# Altium PCB PCB_all.PcbDoc (part 2 of 5)
Units mm, origin at the board's own origin, x right, y up, seen from the top; angles counter-clockwise.
Board outline 345 x 232.5 mm, 2 copper layers (Top Layer, Bottom Layer); 484 components, 419 nets, 1569 pads, 736 vias.
Unrouted connection lines stored in the file: 51.
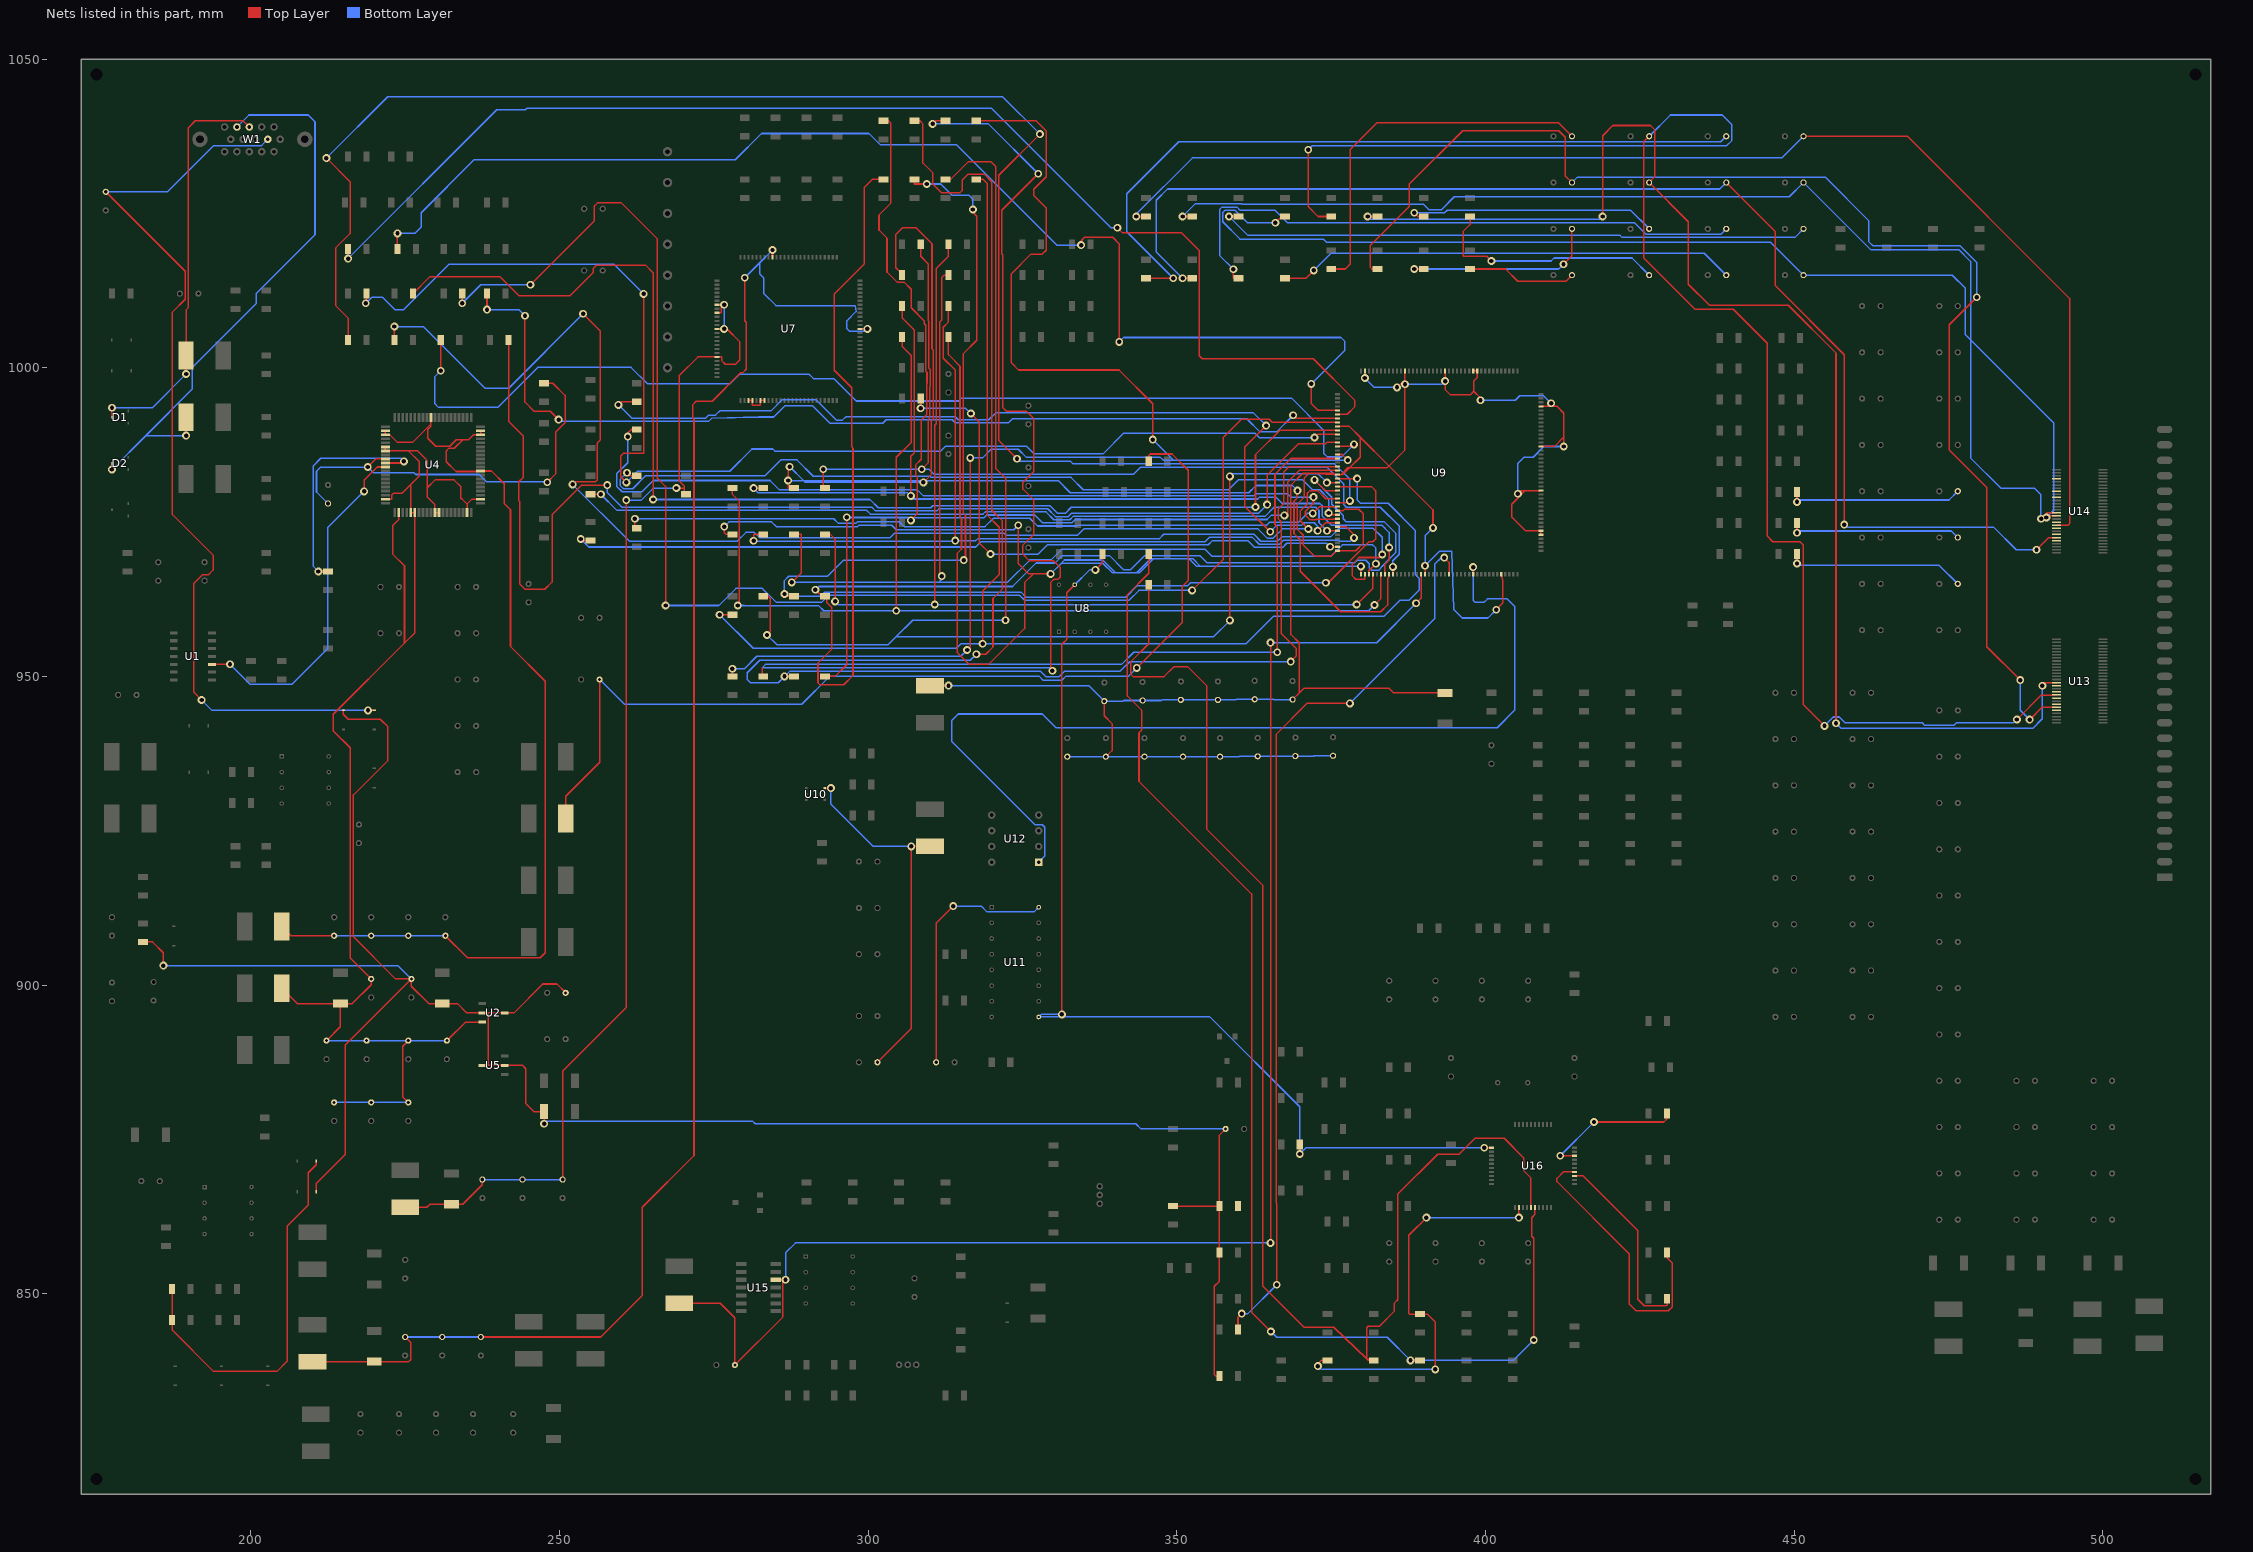
[diagram p2: the nets of this part, all layers, seen from the top]

## Via types
v1: diameter 1.27, hole 0.711, Top Layer to Bottom Layer, 736 vias

## Nets (pads, with @x,y where several pads share a name; then routed paths per layer and width w, separated by ;. In a path a pad name is that pad's centre, name@x,y a point inside that pad or via, vN(x,y) a via of type N, cw(c..) or ccw(c..) an arc to the next point about the centre after c; other vN are vias at no path point) (continued)
3V3SD: C64.1 C65.2 C66.2 C67.2 C68.2 C69.2 C71.2 C73.2 C75.2 C77.2 C81.2 C85.2 C89.2 C94.2 C98.2 L19.2 U9.17 U9.36 U9.45 U9.46 U9.56 U9.67 U9.77 U9.91 U9.92 U9.99 U9.109 U9.119 U9.129 U9.141 U9.150 U9.160 | length 398.7
  Top Layer w0.25: L19.2@310,948.5 312.992,948.5 v1(313.004,948.512) ; C98.2@338.25,946 338.25,943.612 339.496,942.365 339.496,937.996 C73.2@338.5,937 ; C77.2@368.75,946.25 369.818,947.318 ; U9.150@376,976.85 376.931,976.85 377.167,977.085 379.469,977.085 380.211,976.344 380.211,971.593 378.968,970.35 U9.160@376,970.35 375.844,970.35 374.963,969.469 372.311,969.469 370.484,971.296 370.484,972.857 369.478,973.863 369.478,977.863 370.605,978.99 370.605,982.119 371.408,982.922 ; U9.129@376,990.5 377.952,990.5 379.705,988.747 ; v1(380.45,998.338) U9.119@380.45,999.5 ; v1(385.65,996.814) 386.95,998.114 ; U9.109@386.95,999.5 386.95,998.114 ; U9.17@390.2,966.55 v1(390.2,967.918) ; v1(391.49,974.065) 391.49,976.962 384.354,984.098 ; C64.1@393.45,947.35 385.085,947.35 384.319,948.116 370.616,948.116 369.818,947.318 ; U9.99@393.45,999.5 v1(393.45,997.833) 393.45,996.463 394.308,995.606 397.508,995.606 398.092,996.19 ; U9.92@398,999.5 U9.91@398.65,999.5 398.65,998.42 398.092,997.862 398.092,996.19 ; v1(399.183,994.746) 399.183,995.099 398.092,996.19 ; v1(401.726,960.806) 402.768,961.847 402.768,965.53 U9.36@402.55,966.55 ; v1(405.232,979.592) 405.74,980.1 406.434,980.1 ; U9.45@408.95,972.95 U9.46@408.95,973.6 406.46,973.6 404.234,975.826 404.234,977.9 406.434,980.1 ; U9.56@408.95,980.1 406.434,980.1 ; U9.67@408.95,987.25 411.15,987.25 412.674,988.774 ; U9.77@408.95,993.75 410.108,993.75 ; v1(410.616,994.258) 410.108,993.75 ; v1(412.674,987.247) 412.674,988.774 ; 369.818,947.318 369.818,955.44 368.47,956.788 368.47,980.988 370.405,982.922 371.408,982.922 ; 371.408,982.922 375.314,982.922 375.536,982.7 ; 371.408,982.922 375.536,982.7 ; 375.536,982.7 U9.141@376,982.7 376.584,982.7 376.734,982.85 ; 376.734,982.85 377.675,983.791 377.975,983.791 ; 376.734,982.85 376.885,982.7 377.975,983.791 ; 377.975,983.791 384.046,983.791 384.354,984.098 ; 377.975,983.791 379.705,985.52 379.705,988.747 ; 379.705,988.747 384.354,984.098 ; 384.354,984.098 386.95,986.695 v1(386.95,997.331) 386.95,998.114 ; 410.108,993.75 410.616,993.75 411.556,993.75 412.674,992.632 412.674,988.774
  Bottom Layer w0.25: v1(313.004,948.512) 335.738,948.512 C98.2@338.25,946 341.3,946 341.4,946.1 C94.2@344.45,946.1 347.497,946.1 347.597,946.2 C89.2@350.65,946.2 C85.2@356.65,946.2 359.562,946.2 359.662,946.3 C81.2@362.6,946.3 365.633,946.3 365.683,946.25 C77.2@368.75,946.25 ; C75.2@332.25,937 C73.2@338.5,937 C71.2@344.75,937 C69.2@351,937 C68.2@357,937 360.02,937 360.07,937.05 C67.2@363.1,937.05 366.116,937.05 366.166,937.1 C66.2@369.2,937.1 372.212,937.1 372.262,937.15 C65.2@375.3,937.15 ; v1(380.45,998.338) 381.974,996.814 v1(385.65,996.814) ; v1(386.95,997.331) 386.973,997.308 392.924,997.308 v1(393.45,997.833) ; v1(391.49,974.065) 390.2,972.774 v1(390.2,967.918) 392.562,970.28 394.539,970.28 394.824,960.882 396.24,959.466 400.386,959.466 v1(401.726,960.806) ; v1(399.183,994.746) 404.816,994.746 405.547,995.477 409.398,995.477 v1(410.616,994.258) ; v1(405.232,979.592) 405.232,984.504 406.246,985.518 407.719,985.518 409.448,987.247 v1(412.674,987.247)
5V_DDC: D6.1 R50.2 R51.2 | length 63.1
  Top Layer w0.25: R50.2@187.25,850.75 R51.2@187.25,845.75 187.25,844.116 193.953,837.413 204.216,837.413 205.892,839.089 205.892,860.984 209.296,864.387 209.296,869.594 210.6,870.898 D6.1@210.6,871.5
5V_STBY: C6.1 C9.1 C35.1 C36.1 C169.1 D4.1 D7.1 R1.2 R206.1 R207.1 R209.1 R236.2 U2.2 U2.4 U5.2 U5.4 | length 362.8
  Top Layer w0.25: R1.2@182.5,907 184.082,907 185.826,905.256 v1(185.826,903.148) ; D7.1@210.6,866.5 210.6,867.867 215.29,872.558 215.29,890.29 C9.1@226,901 ; D4.1@215,944.5 214.986,944.5 214.986,943.864 215.773,943.077 220.955,943.077 222.199,941.832 222.199,936.396 216.611,930.808 216.611,907.821 223.433,901 C9.1@226,901 ; U5.4@237.5,887 238.43,887 ; v1(247.498,877.545) 247.5,877.547 C35.1@247.5,879.475 ; C35.1@247.5,879.5 C35.1@247.5,879.475 ; C36.1@251,898.75 249.574,900.176 247.288,900.176 242.612,895.5 U2.4@241.1,895.5 238.43,895.5 ; R236.2@349.4,864.2 R206.1@356.9,864.2 ; R209.1@356.9,836.7 356.9,836.676 356.311,836.676 356.057,836.93 356.057,851.2 356.9,852.043 R207.1@356.9,856.7 R206.1@356.9,864.2 ; C169.1@357.9,876.7 356.9,875.7 R206.1@356.9,864.2 ; C9.1@226,901 226,899.82 228.82,897 C6.1@231,897 233.477,897 234.977,895.5 U2.2@237.5,895.5 238.43,895.5 ; 238.43,887 238.43,895.5 ; 238.43,887 U5.2@241.1,887 243.986,887 244.526,886.46 244.526,880.821 245.872,879.475 C35.1@247.5,879.475
  Bottom Layer w0.25: v1(185.826,903.148) 223.852,903.148 C9.1@226,901 ; v1(247.498,877.545) 247.923,877.97 281.28,877.97 281.705,877.545 343.332,877.545 344.176,876.7 C169.1@357.9,876.7
5V_VGA: C172.2 D5.1 W1.9 | length 152.1
  Top Layer w0.25: C172.2@176.5,1028.5 189.382,1015.618 189.382,1011.098 187.3,1009.015 187.3,976.232 193.883,969.649 193.883,967.232 193.088,966.437 192.118,966.437 190.781,965.1 190.781,947.418 v1(192.024,946.175) ; v1(218.973,944.499) v1(218.973,944.499) D5.1@220,944.5
  Bottom Layer w0.25: C172.2@176.5,1028.5 186.515,1028.5 194.005,1035.99 201.74,1035.99 W1.9@202.75,1037 ; v1(192.024,946.175) 193.7,944.499 v1(218.973,944.499)
5Va: C130.2 U11.16 | length 41
  Top Layer w0.25: C130.2@311,887.5 311,910.034 v1(313.766,912.8)
  Bottom Layer w0.25: v1(313.766,912.8) 318.314,912.8 319.253,911.861 326.861,911.861 U11.16@327.62,912.62
5Vb: C128.1 L20.2 U10.5 | length 59.9
  Top Layer w0.25: U10.5@293,931.9 v1(293.954,931.9) ; C128.1@301.5,887.5 307.01,893.01 307.01,922.17 v1@307.34,922.5 ; v1(306.984,922.477) v1@307.34,922.5 ; L20.2@310,922.5 v1@307.34,922.5
  Bottom Layer w0.25: v1(293.954,931.9) 293.954,929.284 300.761,922.477 v1(306.984,922.477)
12MHZ: C158.1 L24.1 U9.16 U15.12 | length 248.3
  Top Layer w0.25: L24.1@269.4,848.46 276.049,848.46 278.4,846.109 C158.1@278.4,838.46 286.182,846.242 v1@286.182,852.27 ; U15.12@285,852.27 v1@286.182,852.27 ; v1(286.612,852.27) v1@286.182,852.27 ; v1(365.176,858.241) v1(365.176,955.472) ; v1(388.747,961.847) 389.55,962.65 U9.16@389.55,966.55
  Bottom Layer w0.25: v1(286.612,852.27) 286.612,856.639 288.214,858.241 v1(365.176,858.241) ; v1(365.176,955.472) 382.372,955.472 v1(388.747,961.847)
9883_HS: R14.2 U4.30 | length 37.5
  Top Layer w0.25: v1(210.947,967.003) 210.95,967 R14.2@212.5,967 ; U4.30@221.778,984.575 224.531,984.575 v1(224.79,984.834)
  Bottom Layer w0.25: v1(210.947,967.003) 210.129,967.821 210.129,984.143 211.328,985.342 224.282,985.342 v1(224.79,984.834)
9883_VS: U1.10 U4.31 | length 56.5
  Top Layer w0.25: U1.10@193.7,951.96 v1(196.621,951.96) ; v1(218.338,979.983) 218.338,981.791 220.472,983.925 U4.31@221.778,983.925
  Bottom Layer w0.25: v1(196.621,951.96) 199.866,948.715 206.654,948.715 212.465,954.526 212.465,974.109 v1(218.338,979.983)
+3V3: C1.1 C2.1 C3.1 C4.1 L1.1 U4.11 U4.22 U4.23 U4.69 U4.78 U4.79 | length 163.9
  Top Layer w0.25: L1.1@205,909.5 206.5,908 C1.1@213.5,908 ; U4.22@221.778,989.775 U4.23@221.778,989.125 222.557,989.125 223.774,987.908 226.178,987.908 229.175,990.905 ; U4.11@229.175,991.972 229.175,990.905 ; C4.1@231.5,908 235.082,904.418 246.888,904.418 247.701,905.231 247.701,949.223 242.056,954.868 242.056,977.005 241.047,978.014 241.047,981.191 238.963,983.275 U4.69@237.222,983.275 236.416,983.197 233.236,983.197 231.65,984.783 231.65,986.536 232.095,986.981 232.931,986.981 234.386,988.329 ; U4.79@237.222,989.775 U4.78@237.222,989.125 236.04,989.125 235.244,988.329 234.386,988.329 ; 229.175,990.905 229.175,990.524 228.668,990.016 228.668,988.568 229.961,987.275 232.221,987.275 233.275,988.329 234.386,988.329
  Bottom Layer w0.25: C1.1@213.5,908 C2.1@219.5,908 C3.1@225.5,908 C4.1@231.5,908
A3_3V: C57.1 C58.2 C59.2 C60.2 L18.2 R59.1 U7.82 U7.84 U7.88 U7.95 | length 199.2
  Top Layer w0.25: L18.2@225,864 228.498,864 228.998,864.5 C57.1@232.5,864.5 234.336,864.5 237.5,867.664 C58.2@237.5,868.5 ; C60.2@250.5,868.5 250.5,886.059 260.807,896.366 v1(260.807,978.56) ; v1(268.935,980.516) 270.205,980.516 ; R59.1@270.5,979.5 270.205,979.5 270.205,980.516 ; U7.88@275.5,1006.3 v1(276.657,1006.3) 277.086,1006.3 279.22,1004.166 279.22,1001.288 278.514,1000.582 276.86,1000.582 276.25,1001.192 276.25,1001.75 U7.95@275.5,1001.75 272.415,1001.75 269.367,998.702 269.367,981.685 270.205,980.846 270.205,980.516 ; U7.84@275.5,1008.9 276.225,1008.9 276.225,1009.768 v1(276.657,1010.2) U7.82@275.5,1010.2
  Bottom Layer w0.25: C58.2@237.5,868.5 C59.2@244,868.5 C60.2@250.5,868.5 ; v1(260.807,978.56) 263.271,978.56 265.227,980.516 v1(268.935,980.516) ; v1(276.657,1006.3) v1(276.657,1010.2)
A3V3: C12.1 C14.1 C26.1 C28.1 C30.1 C31.1 C32.1 C33.1 C34.1 L7.1 U2.3 U4.26 U4.27 U4.39 U4.42 U4.45 U4.46 U4.51 U4.52 U4.59 U4.62 | length 228.7
  Top Layer w0.25: L7.1@205,899.5 207.5,897 C14.1@214.5,897 ; C34.1@212.25,891 214.5,893.25 C14.1@214.5,897 ; U4.39@221.778,978.725 222.86,978.725 222.86,979.424 223.114,979.678 224.485,979.678 225.925,981.118 ; U4.26@221.778,987.175 U4.27@221.778,986.525 225.552,986.525 ; U4.42@223.975,976.528 223.975,975.438 222.961,974.424 222.961,969.848 224.892,967.918 224.892,955.396 ; C26.1@225.5,881 224.612,881.888 224.612,890.112 C32.1@225.5,891 ; U4.52@230.475,976.528 U4.51@229.825,976.528 229.825,977.82 228.577,979.068 228.577,980.565 ; C31.1@231.75,891 234.75,894 U2.3@237.5,894 ; U4.59@235.025,976.528 235.025,977.936 ; U4.62@237.222,978.725 235.814,978.725 235.025,977.936 ; C14.1@214.5,897 216.432,897 219.5,900.068 C12.1@219.5,901 216.103,904.397 216.103,938.428 213.36,941.172 213.36,943.864 224.892,955.396 ; 224.892,955.396 226.575,957.079 U4.46@226.575,976.528 U4.45@225.925,976.528 225.925,981.118 ; 225.552,986.525 227.036,986.525 228.577,984.985 228.577,980.565 ; 225.552,986.525 227.305,984.772 227.305,982.497 225.925,981.118 ; 228.577,980.565 229.847,981.835 232.916,981.835 234.029,980.722 234.029,978.757 234.204,978.757 235.025,977.936
  Bottom Layer w0.25: C34.1@212.25,891 C33.1@218.75,891 C32.1@225.5,891 C31.1@231.75,891 ; C30.1@213.5,881 C28.1@219.5,881 C26.1@225.5,881
ADC1: R222.2 U16.34 | length 45.3
  Top Layer w0.25: U16.34@414.4,869.75 412.626,869.75 411.556,868.68 411.556,868.172 423.266,856.463 423.266,848.36 424.383,847.242 429.616,847.242 430.225,847.852 430.225,855.002 429.4,855.828 R222.2@429.4,856.7
ADC2: R224.2 U16.33 | length 31.3
  Top Layer w0.25: U16.33@414.4,869.1 415.786,869.1 424.637,860.249 424.637,849.122 425.704,848.055 429.298,848.055 429.4,848.157 R224.2@429.4,849.2
ASIC_H: C39.1 L9.2 R108.2 | length 160.4
  Top Layer w0.25: L9.2@251,927 251,930.605 256.5,936.105 C39.1@256.5,949.5 ; v1(343.51,951.382) 350.853,958.726 350.853,964.568 351.842,965.558 351.842,983.41 349.225,986.028 345.704,986.028 345.45,985.774 R108.2@345.45,984.85
  Bottom Layer w0.25: C39.1@256.5,949.5 260.51,945.49 289.226,945.49 293.798,950.062 327.65,950.062 328.319,949.393 331.362,949.393 332.031,950.062 342.189,950.062 v1(343.51,951.382)
ASIC_RESET: R118.2 R182.1 U8.7 U11.9 U16.11 | length 170.8
  Top Layer w0.25: v1(331.368,895.248) 331.368,955.202 332.153,955.987 332.153,963.553 U8.7@333.45,964.85 ; v1(336.804,967.257) 337.95,968.403 R118.2@337.95,969.85 ; v1(369.9,872.642) R182.1@369.9,874.2 ; v1(399.796,873.658) 399.804,873.65 U16.11@400.95,873.65
  Bottom Layer w0.25: v1(331.368,895.248) 328.028,895.248 U11.9@327.62,894.84 355.348,894.84 369.9,880.288 v1(369.9,872.642) 370.916,873.658 v1(399.796,873.658) ; U8.7@333.45,964.85 335.857,967.257 v1(336.804,967.257)
ASIC_SCL: R114.2 R221.2 U16.26 | length 206.7
  Top Layer w0.25: R114.2@345.45,969.85 345.45,966.709 341.992,963.25 341.992,946.83 344.348,944.474 344.348,941.349 343.865,940.867 343.865,932.993 362.102,914.756 362.102,847.012 v1(365.227,843.888) ; v1(387.838,839.2) R221.2@389.4,839.2 ; v1(407.797,842.518) 407.797,859 407.467,859.33 407.467,862.33 408,862.863 U16.26@408,864
  Bottom Layer w0.25: v1(365.227,843.888) 366.164,842.95 384.088,842.95 v1(387.838,839.2) 404.479,839.2 v1(407.797,842.518)
ASIC_SDA: R115.2 R219.2 U16.25 | length 219
  Top Layer w0.25: R115.2@345.45,964.85 345.45,955.298 342.496,952.343 342.496,950.383 342.9,949.979 347.923,949.979 349.479,951.535 351.79,951.535 354.863,948.461 354.863,925.22 363.88,916.203 363.88,851.286 370.591,844.575 375.412,844.575 380.746,839.454 ; U16.25@407.35,864 407.35,868.771 406.165,869.956 406.165,872.047 403.036,875.176 398.278,875.176 395.718,872.617 392.253,872.617 385.783,866.147 385.783,849.034 385.248,848.499 385.248,847.198 382.803,844.753 381,844.753 380.746,844.499 380.746,839.454 ; 380.746,839.454 R219.2@381.9,839.2 381,839.2 380.746,839.454
AUDIO_EN: R215.2 U16.38 | length 23
  Top Layer w0.25: v1(412.09,872.35) U16.38@414.4,872.35 ; v1(417.564,877.824) 428.892,877.824 429.4,878.332 R215.2@429.4,879.2
  Bottom Layer w0.25: v1(412.09,872.35) v1(417.564,877.824)
AUDIO_MUTE: R212.2 R233.1 U16.22 | length 67.3
  Top Layer w0.25: v1(372.847,838.276) 372.847,838.667 373.38,839.2 R233.1@374.4,839.2 ; v1(390.423,862.33) 387.579,859.485 387.579,846.802 387.68,846.7 R212.2@389.4,846.7 390.585,846.7 391.846,845.439 v1(391.846,837.743) ; v1(405.4,862.33) U16.22@405.4,864
  Bottom Layer w0.25: v1(372.847,838.276) 373.38,837.743 v1(391.846,837.743) ; v1(390.423,862.33) v1(405.4,862.33)
B_IN: D1.3 L4.1 W1.3 | length 66.6
  Top Layer w0.25: D1.3@177.5,992 v1(177.5,993.521) ; v1(189.509,998.982) 189.5,998.991 L4.1@189.5,1002 189.5,1009.371 189.89,1009.761 189.89,1038.885 191.008,1040.003 198.747,1040.003 W1.3@199.75,1039
  Bottom Layer w0.25: v1(177.5,993.521) 184.048,993.521 v1(189.509,998.982)
B_INA0: R32.2 U9.147 | length 212.9
  Top Layer w0.25: R32.2@223.25,1004.5 v1(223.25,1006.678) ; v1(252.12,981.1) 252.527,981.507 255.778,981.507 256.134,981.862 256.134,987.849 256.629,988.344 256.629,1005.929 v1(253.822,1008.736) ; v1(371.297,973.887) 369.982,975.202 369.982,976.796 371.109,977.923 371.109,979.678 371.488,980.057 372.872,980.057 374.129,978.8 U9.147@376,978.8
  Bottom Layer w0.25: v1(223.25,1006.678) 227.94,1006.678 237.922,996.696 241.783,996.696 v1(253.822,1008.736) ; v1(252.12,981.1) 261.341,971.88 278.74,971.88 280.187,973.328 281.555,973.328 282.453,972.43 303.505,972.43 304.276,973.201 322.001,973.201 322.357,972.845 333.865,972.845 334.906,973.887 363.148,973.887 364.619,972.416 365.631,972.416 367.102,973.887 v1(371.297,973.887)
B_INA1: R31.2 U9.148 | length 272.6
  Top Layer w0.25: v1(212.242,1033.958) 216.078,1030.122 216.078,1021.74 213.72,1019.383 213.72,1010.077 215.75,1008.047 R31.2@215.75,1004.5 ; v1(324.104,985.266) 321.142,988.228 321.142,1031.174 v1(327.812,1037.844) ; U9.148@376,978.15 377.745,978.15 v1(378.028,978.433)
  Bottom Layer w0.25: v1(212.242,1033.958) 222.178,1043.894 321.763,1043.894 v1(327.812,1037.844) ; v1(324.104,985.266) 324.536,984.834 332.791,984.834 333.207,984.418 375.549,984.418 378.028,981.939 v1(378.028,978.433)
B_INA2: R30.2 U9.149 | length 118.8
  Top Layer w0.25: v1(262.204,975.538) 262.204,974 R30.2@262.5,974 ; v1(372.008,976.401) 373.107,977.5 U9.149@376,977.5
  Bottom Layer w0.25: v1(262.204,975.538) 294.437,975.538 295.199,974.776 298.018,974.776 298.283,975.041 305.048,975.041 305.819,974.27 318.926,974.27 320.296,975.639 326.161,975.639 327.431,974.369 333.807,974.369 333.959,974.522 364.566,974.522 365.023,974.979 369.697,974.979 371.119,976.401 v1(372.008,976.401)
B_INA3: R29.2 U9.151 | length 129
  Top Layer w0.25: v1(260.934,983.005) 261.44,982.5 R29.2@262.5,982.5 ; v1(374.574,976.478) 374.851,976.2 U9.151@376,976.2
  Bottom Layer w0.25: v1(260.934,983.005) 259.817,981.888 259.817,980.948 260.35,980.415 261.849,980.415 263.931,982.497 283.286,982.497 285.852,985.063 288.468,985.063 291.086,982.445 309.954,982.445 310.155,982.243 332.867,982.243 334.853,980.258 358.369,980.258 359.973,981.862 370.357,981.862 371.987,980.233 373.149,980.233 374.574,978.809 v1(374.574,976.478)
B_INA4: R28.2 U9.152 | length 135.5
  Top Layer w0.25: v1(261.061,988.847) 261.061,989.441 261.62,990 R28.2@262.5,990 ; v1(372.135,979.043) 372.135,978.052 370.84,976.757 370.84,976.097 371.549,975.387 372.516,975.387 372.591,975.462 375.425,975.462 375.514,975.55 U9.152@376,975.55
  Bottom Layer w0.25: v1(261.061,988.847) 261.061,984.631 259.283,982.853 259.283,980.769 260.145,979.907 263.343,979.907 265.172,981.735 284.099,981.735 285.572,980.262 307.922,980.262 308.938,979.246 362.407,979.246 362.763,979.602 367.919,979.602 368.478,979.043 v1(372.135,979.043)
B_INA5: R27.2 U9.153 | length 146.7
  Top Layer w0.25: v1(259.537,993.992) 260.045,994.5 R27.2@262.5,994.5 ; v1(364.465,990.625) 361.01,987.171 361.01,977.544 v1(365.125,973.43) ; v1(372.796,973.607) 374.088,974.9 U9.153@376,974.9
  Bottom Layer w0.25: v1(259.537,993.992) 261.72,991.809 273.644,991.809 274.162,992.327 275.262,992.327 275.948,993.013 284.251,993.013 286.082,994.844 291.488,994.844 294.816,991.516 295.834,991.516 296.385,992.067 314.106,992.067 314.606,991.567 319.534,991.567 320.65,992.683 362.407,992.683 v1(364.465,990.625) ; v1(365.125,973.43) 366.15,974.455 370.188,974.455 370.636,974.903 372.237,974.903 372.796,974.344 v1(372.796,973.607)
B_INA6: R26.2 U9.154 | length 132.8
  Top Layer w0.25: v1(253.441,972.261) 253.702,972 R26.2@255,972 ; U9.154@376,974.25 377.386,974.25 378.689,972.947 v1(378.689,972.439)
  Bottom Layer w0.25: v1(253.441,972.261) 254.735,970.968 317.404,970.968 318.27,971.833 354.572,971.833 355.257,972.518 362.241,972.518 363.351,971.408 366.639,971.408 367.314,972.082 376.195,972.082 376.345,971.932 378.182,971.932 v1(378.689,972.439)
B_INA7: R25.2 U9.155 | length 126.6
  Top Layer w0.25: R25.2@255,979.5 v1(256.692,979.5) ; v1(374.32,973.607) 374.327,973.6 U9.155@376,973.6
  Bottom Layer w0.25: v1(256.692,979.5) 259.306,976.886 299.783,976.886 300.369,976.299 318.594,976.299 318.944,976.65 328.818,976.65 330.073,975.395 332.664,975.395 333.193,975.925 364.255,975.925 365.746,977.415 372.491,977.415 373.022,976.884 373.022,974.905 v1(374.32,973.607)
B_INB0: R73.2 R97.2 U9.1 | length 218.3
  Top Layer w0.25: v1(276.682,974.268) 276.682,973.328 277.01,973 R73.2@278,973 ; R97.2@313,1005 313,1002.132 314.869,1000.262 314.869,975.806 315.112,975.563 315.112,970.636 314.452,969.975 314.452,953.825 316.285,951.992 319.557,951.992 325.323,957.758 325.323,965.2 326.72,966.597 v1(329.54,966.597) ; v1(324.307,974.496) 324.307,968.292 325.998,966.601 v1(329.531,966.601) ; U9.1@379.8,966.55 v1(379.8,967.816)
  Bottom Layer w0.25: v1(276.682,974.268) 277.444,975.03 284.353,975.03 285.115,974.268 298.272,974.268 298.501,974.496 303.813,974.496 304.544,973.766 323.577,973.766 v1(324.307,974.496) ; v1(329.531,966.601) 331.787,968.858 337.998,968.858 340.075,966.781 343.494,966.781 345.774,969.061 346.227,969.061 ; v1(329.54,966.597) 331.292,968.35 337.998,968.35 339.573,966.775 343.941,966.775 346.227,969.061 ; v1(379.8,967.816) 353.845,967.816 ; 346.227,969.061 351.968,969.061 ; 351.968,969.061 352.601,969.061 353.845,967.816 ; 351.968,969.061 353.212,967.816 353.845,967.816
B_INB1: R72.2 R96.2 U9.2 | length 159.2
  Top Layer w0.25: v1(281.432,971.982) 281.434,973 R72.2@283,973 ; R96.2@313,1010 313,1007.402 312.175,1006.577 312.175,1001.538 314.096,999.617 v1(314.096,972.007) v1@314.015,971.926 ; U9.2@380.45,966.55 380.45,965.76 378.968,965.76 378.383,966.345 378.383,968.145 379.501,969.264 382.778,969.264 v1(383.261,969.747)
  Bottom Layer w0.25: v1(281.432,971.982) 281.488,971.926 v1@314.015,971.926 ; v1(314.096,972.007) 317.436,972.007 317.766,972.337 347.193,972.337 347.878,973.023 362.495,973.023 363.607,971.912 366.293,971.912 366.973,972.591 374.904,972.591 376.321,974.009 381.787,974.009 383.261,972.536 v1(383.261,969.747)
B_INB2: R71.2 R95.2 U9.3 | length 163.6
  Top Layer w0.25: v1(287.63,965.225) 289.128,966.724 289.128,973 R71.2@288,973 ; v1(311.912,966.241) 311.617,966.536 311.617,1007.439 311.912,1007.734 311.912,1014.628 312.284,1015 R95.2@313,1015 ; U9.3@381.1,966.55 381.1,967.105 v1(382.243,968.248)
  Bottom Layer w0.25: v1(287.63,965.225) 311.404,965.225 ; v1(311.912,966.241) 311.912,965.733 311.404,965.225 ; v1(382.243,968.248) 382.243,970.788 381.724,971.306 376.819,971.306 374.982,969.469 355.688,969.469 354.584,970.573 331.306,970.573 329.61,968.877 326.193,968.877 322.541,965.225 311.404,965.225
B_INB3: R70.2 R94.2 U9.4 | length 162
  Top Layer w0.25: R70.2@293,973 293.878,973 294.64,972.238 v1(294.64,962.152) ; v1(310.769,961.644) 310.769,990.679 311.035,990.944 311.035,1016.092 313,1018.057 R94.2@313,1020 ; v1(379.12,961.644) 381.75,964.274 U9.4@381.75,966.55
  Bottom Layer w0.25: v1(294.64,962.152) 295.148,961.644 v1(310.769,961.644) v1(379.12,961.644)
B_INB4: R69.2 R93.2 U9.6 | length 174.9
  Top Layer w0.25: R69.2@278,980.5 278,979.478 279.146,978.332 279.146,961.771 v1(278.867,961.492) ; v1(304.557,960.628) 304.557,985.486 306.961,987.89 306.961,1001.966 305.5,1003.427 R93.2@305.5,1005 ; v1(382.016,961.568) 383.05,962.602 U9.6@383.05,966.55
  Bottom Layer w0.25: v1(278.867,961.492) 279.91,961.492 279.92,961.482 291.932,961.482 292.786,960.628 v1(304.557,960.628) 381.076,960.628 v1(382.016,961.568)
B_INB5: R68.2 R92.2 U9.7 | length 147.6
  Top Layer w0.25: v1(281.432,980.5) R68.2@283,980.5 ; R92.2@305.5,1010 305.5,1008.069 307.469,1006.1 307.469,986.21 306.908,985.649 v1(306.908,979.246) ; U9.7@383.7,966.55 383.7,968.183 384.378,968.862 v1(384.378,970.89)
  Bottom Layer w0.25: v1(281.432,980.5) 282.203,979.729 306.426,979.729 v1(306.908,979.246) 307.416,978.738 363.085,978.738 363.398,979.051 366.014,979.051 367.055,978.01 373.169,978.01 373.532,977.646 373.532,975.995 375.015,974.513 383.193,974.513 384.378,973.328 v1(384.378,970.89)
B_INB6: R67.2 R91.2 U9.8 | length 202.7
  Top Layer w0.25: v1(287.274,983.971) 287.274,984.479 287.02,984.479 v1(287.02,981.729) 287.02,980.5 R67.2@288,980.5 ; R91.2@305.5,1015 305.179,1015 305.179,1015.504 304.47,1016.213 304.47,1021.584 305.564,1022.678 307.748,1022.678 310.333,1020.093 310.333,1003.064 310.53,1002.867 310.53,996.468 310.505,996.443 310.505,991.692 310.236,991.423 310.236,982.726 v1(308.94,981.431) ; v1(369.539,980.104) 369.437,980.002 369.437,978.829 368.974,978.367 368.974,973.142 369.976,972.14 369.976,967.036 376.537,960.476 383.032,960.476 384.128,961.572 384.128,965.894 384.35,966.116 U9.8@384.35,966.55
  Bottom Layer w0.25: v1(287.02,981.729) 289.516,981.729 ; v1(287.274,983.971) 289.516,981.729 ; v1(308.94,981.431) 289.814,981.431 289.516,981.729 ; v1(369.539,980.104) 368.716,980.928 362.832,980.928 361.658,979.754 332.746,979.754 330.771,981.729 289.516,981.729
B_INB7: R66.2 R90.2 U9.9 | length 149.3
  Top Layer w0.25: v1(292.71,983.564) 292.71,980.5 R66.2@293,980.5 ; R90.2@308.5,1020 308.5,1018.057 309.702,1016.855 309.702,1007.636 309.829,1007.509 309.829,999.958 310.026,999.761 310.026,996.922 310.001,996.897 310.001,991.927 309.702,991.628 309.702,984.58 v1(308.686,983.564) ; v1(384.988,967.74) 385,967.728 U9.9@385,966.55
  Bottom Layer w0.25: v1(292.71,983.564) v1(308.686,983.564) 309.843,983.564 310.656,982.751 342.974,982.751 344.136,983.914 374.276,983.914 377.014,981.176 377.014,977.849 377.444,977.419 382.954,977.419 386.019,974.354 386.019,969.787 384.988,968.756 v1(384.988,967.74)
BA0: C117.2 R136.1 U14.16 | length 183
  Top Layer w0.25: v1(365.963,1023.493) 366.97,1024.5 R136.1@367.5,1024.5 ; v1(490.855,975.741) 491.155,975.741 491.414,976 U14.16@492.5,976
  Bottom Layer w0.25: v1(365.963,1023.493) 361.442,1023.493 359.412,1025.523 357.81,1025.523 357.431,1025.144 357.431,1023.643 360.223,1020.851 373.71,1020.851 374.218,1020.343 446.157,1020.343 C117.2@451.5,1015 475.599,1015 477.698,1012.901 477.698,1005.383 492.023,991.057 492.023,976.909 v1(490.855,975.741)
BA1: C114.2 R135.1 U14.18 | length 96.6
  Top Layer w0.25: v1(358.445,1024.509) 358.454,1024.5 R135.1@360,1024.5
  Bottom Layer w0.25: v1(358.445,1024.509) 361.518,1021.436 421.798,1021.436 422.117,1021.117 450.117,1021.117 C114.2@451.5,1022.5
BA2: C111.2 R134.1 U14.15 | length 190.1
  Top Layer w0.25: v1(350.926,1024.509) 350.935,1024.5 R134.1@352.5,1024.5 ; v1(489.991,975.535) 490.957,976.5 U14.15@492.5,976.5
  Bottom Layer w0.25: v1(350.926,1024.509) 352.948,1026.531 360.467,1026.531 360.533,1026.465 389.975,1026.465 390.837,1025.603 392.865,1025.603 394.946,1027.684 449.184,1027.684 C111.2@451.5,1030 462.363,1019.137 476.643,1019.137 478.561,1017.219 478.561,985.397 483.448,980.51 488.88,980.51 489.966,979.424 489.966,975.56 v1(489.991,975.535)
BA3: C108.2 R133.1 U14.19 | length 207.9
  Top Layer w0.25: v1(343.433,1024.5) R133.1@345,1024.5 ; C108.2@451.5,1037.5 468.339,1037.5 494.606,1011.233 494.606,974.75 494.356,974.5 U14.19@492.5,974.5
  Bottom Layer w0.25: v1(343.433,1024.5) 343.433,1024.89 352.527,1033.983 447.983,1033.983 C108.2@451.5,1037.5
BA4: C105.2 R132.1 U14.20 | length 74.7
  Top Layer w0.25: R132.1@367.5,1014.5 370.904,1014.5 v1(372.174,1015.77)
  Bottom Layer w0.25: v1(372.174,1015.77) 374.969,1018.565 435.435,1018.565 C105.2@439,1015
BA5: C102.2 R131.1 U14.22 | length 97.3
  Top Layer w0.25: v1(359.156,1015.949) 359.156,1014.5 R131.1@360,1014.5
  Bottom Layer w0.25: v1(359.156,1015.949) 356.927,1018.178 356.927,1025.652 357.302,1026.027 359.739,1026.027 360.243,1025.523 365.894,1025.523 367.95,1023.468 424.155,1023.468 426.001,1021.621 438.121,1021.621 C102.2@439,1022.5
BA6: C99.2 R128.1 U14.23 | length 209.7
  Top Layer w0.25: v1(350.926,1014.5) R128.1@352.5,1014.5 ; C99.2@439,1030 446.913,1022.087 446.913,1013.308 458.114,1002.106 v1(458.114,974.598) ; v1(489.245,970.509) 491.236,972.5 U14.23@492.5,972.5
  Bottom Layer w0.25: v1(350.926,1014.5) 346.664,1018.763 346.664,1027.13 348.488,1028.954 437.954,1028.954 C99.2@439,1030 ; v1(458.114,974.598) 458.529,974.184 482.278,974.184 485.953,970.509 v1(489.245,970.509)
BA7: C95.2 R127.1 U14.24 | length 122.2
  Top Layer w0.25: R127.1@345,1014.5 v1(349.402,1014.5)
  Bottom Layer w0.25: v1(349.402,1014.5) 341.88,1022.022 341.88,1028.185 350.295,1036.599 438.099,1036.599 C95.2@439,1037.5
BB0: C91.2 R126.1 U13.16 | length 38.7
  Top Layer w0.25: R126.1@397.5,1024.5 397.5,1023.204 396.367,1022.071 396.367,1018.057 400.177,1018.057 v1(400.939,1017.295)
  Bottom Layer w0.25: v1(400.939,1017.295) 410.62,1017.295 411.101,1017.776 423.724,1017.776 C91.2@426.5,1015
BB1: C86.2 R125.1 U13.18 | length 41.3
  Top Layer w0.25: v1(388.451,1025.099) 389.05,1024.5 R125.1@390,1024.5
  Bottom Layer w0.25: v1(388.451,1025.099) 393.369,1025.099 393.795,1025.525 423.475,1025.525 C86.2@426.5,1022.5
BB2: C82.2 R124.1 U13.15 | length 221.3
  Top Layer w0.25: v1(380.891,1024.5) R124.1@382.5,1024.5 ; v1(418.973,1024.509) 418.973,1037.59 420.624,1039.241 426.72,1039.241 427.38,1038.581 427.38,1030.88 C82.2@426.5,1030 432.841,1023.659 432.841,1013.536 436.27,1010.107 449.047,1010.107 456.768,1002.386 v1(456.768,942.416) ; v1(490.195,948.492) 490.703,949 U13.15@492.5,949
  Bottom Layer w0.25: v1(380.891,1024.5) 381.314,1024.077 418.541,1024.077 v1(418.973,1024.509) ; v1(456.768,942.416) 457.58,941.605 488.663,941.605 490.195,943.136 v1(490.195,948.492)
BB3: C78.2 R123.1 U13.19 | length 255.9
  Top Layer w0.25: v1(371.272,1035.304) 371.272,1026.1 372.872,1024.5 R123.1@375,1024.5 ; C78.2@426.5,1037.5 425.602,1036.602 425.602,1017.803 433.934,1009.472 440.131,1009.472 445.618,1003.986 445.618,972.744 446.532,971.829 450.926,971.829 451.46,971.296 451.46,945.439 v1(454.901,941.997) ; v1(486.068,943.026) 490.016,946.974 491.687,946.974 491.713,947 U13.19@492.5,947
  Bottom Layer w0.25: v1(371.272,1035.304) 371.932,1035.964 439.039,1035.964 439.903,1036.828 439.903,1039.368 438.328,1040.943 429.943,1040.943 C78.2@426.5,1037.5 ; v1(454.901,941.997) 456.334,943.43 457.304,943.43 458.241,942.492 470.725,942.492 471.109,942.109 475.891,942.109 476.275,942.492 485.535,942.492 v1(486.068,943.026)
BB4: C76.2 R122.1 U13.20 | length 17.7
  Top Layer w0.25: R122.1@397.5,1016 403.25,1016 405.232,1014.019 413.019,1014.019 C76.2@414,1015
BB5: C74.2 R121.1 U13.22 | length 32.4
  Top Layer w0.25: v1(388.442,1016) R121.1@390,1016 ; v1(412.623,1016.762) 414,1018.139 C74.2@414,1022.5
  Bottom Layer w0.25: v1(388.442,1016) 411.861,1016 v1(412.623,1016.762)
BB6: C72.2 R120.1 U13.23 | length 214.6
  Top Layer w0.25: R120.1@382.5,1016 381.61,1016 381.356,1016.254 381.356,1019.835 387.655,1026.135 387.655,1029.767 396.291,1038.403 411.861,1038.403 412.928,1037.336 412.928,1031.072 C72.2@414,1030 ; v1(479.577,1011.428) 475.117,1006.968 475.117,986.677 481.203,980.591 481.203,954.811 v1(486.613,949.401) ; v1(488.137,943) 490.137,945 U13.23@492.5,945
  Bottom Layer w0.25: C72.2@414,1030 414.884,1030.884 455.016,1030.884 462.051,1023.849 462.051,1020.47 462.788,1019.734 476.885,1019.734 479.577,1017.041 v1(479.577,1011.428) ; v1(486.613,949.401) 486.613,944.524 v1(488.137,943)
BB7: C70.2 R119.1 U13.24 | length 60.6
  Top Layer w0.25: R119.1@375,1016 377.292,1016 378.054,1016.762 378.054,1035.304 382.422,1039.673 411.827,1039.673 C70.2@414,1037.5
BL_ON_OFF: R206.2
COAST: C25.2 R18.2 U4.29 | length 67.6
  Top Layer w0.25: v1(218.926,983.918) 220.233,985.225 U4.29@221.778,985.225 ; R18.2@247.5,997.5 248.92,997.5 250.897,995.523 250.897,991.094 249.358,989.554 249.358,982.808 v1(248.006,981.456)
  Bottom Layer w0.25: C25.2@212.5,978 210.633,979.867 210.633,983.223 211.328,983.918 v1(218.926,983.918) 219.819,983.025 226.384,983.025 226.703,982.707 236.978,982.707 238.166,981.518 247.944,981.518 v1(248.006,981.456)
D3_3V: C42.1 C45.2 C47.2 C50.2 L13.2 U7.38 U7.67 | length 272.6
  Top Layer w0.25: L13.2@210,839 C42.1@220,839 225.552,839 225.882,839.33 225.882,842.118 C45.2@225,843 ; C50.2@237.25,843 256.692,843 263.398,849.706 263.398,864.006 271.78,872.388 271.78,991.645 271.616,991.809 271.616,994.04 272.157,994.582 274.72,994.582 279.349,999.211 279.705,999.211 280.238,999.744 280.238,1007.389 280.01,1007.618 v1(280.01,1014.578) ; U7.67@284.5,1017.9 284.5,1019.068 v1(284.505,1019.073) ; U7.38@298.7,1006.3 299.861,1006.3 v1(299.864,1006.297)
  Bottom Layer w0.25: C45.2@225,843 C47.2@231,843 C50.2@237.25,843 ; v1(280.01,1014.578) 282.448,1017.016 ; v1(284.505,1019.073) 282.448,1017.016 ; v1(299.864,1006.297) 299.508,1005.942 296.926,1005.942 296.52,1006.348 296.52,1007.567 298.044,1009.092 297.882,1010.066 285.048,1010.066 283.052,1012.063 283.052,1014.584 282.448,1015.187 282.448,1017.016
D3_V3: U7.3 U7.4 U7.6 U7.7 | length 4.1
  Top Layer w0.25: U7.3@280.6,994.7 U7.4@281.25,994.7 281.25,993.953 282.55,993.953 U7.6@282.55,994.7 U7.7@283.2,994.7
DE_IN: R98.2 U9.159 | length 92.2
  Top Layer w0.25: v1(308.483,993.445) 308.5,993.462 R98.2@308.5,995 ; v1(316.636,992.581) 318.008,991.21 318.008,971.626 v1(319.811,969.823) ; v1(374.828,971) U9.159@376,971
  Bottom Layer w0.25: v1(308.483,993.445) 315.773,993.445 v1(316.636,992.581) ; v1(319.811,969.823) 327.558,969.823 329.065,971.329 355.076,971.329 355.761,972.014 361.488,972.014 362.599,970.903 367.143,970.903 367.814,971.574 374.254,971.574 v1(374.828,971)
FBLK: R189.2 U9.23 | length 147
  Top Layer w0.25: R189.2@359.9,844.2 359.9,846.183 v1(360.502,846.785) ; v1(366.192,851.459) 366.192,864.565 366.065,864.692 366.065,940.613 371.094,945.642 v1(378.028,945.642) ; v1(393.319,969.239) 394.1,968.458 U9.23@394.1,966.55
  Bottom Layer w0.25: v1(360.502,846.785) 361.518,846.785 v1(366.192,851.459) ; v1(378.028,945.642) 391.77,959.383 391.77,968.197 392.811,969.239 v1(393.319,969.239)
FCLK1: U9.29 U12.1 | length 154.9
  Top Layer w0.25: v1(397.993,967.715) 398,967.707 U9.29@398,966.55
  Bottom Layer w0.25: U12.1@327.62,919.92 328.599,920.899 328.599,925.576 328.193,925.982 327,925.982 313.538,939.444 313.538,942.848 314.604,943.915 328.193,943.915 330.403,941.705 401.879,941.705 404.698,944.524 404.698,961.365 403.503,962.56 400.304,962.56 399.746,962.002 398.272,962.002 397.993,962.281 v1(397.993,967.715)
G_IN: D2.3 L5.1 W1.2 | length 94.4
  Top Layer w0.25: v1(177.495,983.513) 177.5,983.518 D2.3@177.5,984.5 ; L5.1@189.5,992 189.5,989.009 v1(189.509,989)
  Bottom Layer w0.25: v1(177.495,983.513) 182.982,989 ; v1(189.509,989) 182.982,989 ; W1.2@197.75,1039 199.693,1040.943 209.296,1040.943 210.388,1039.851 210.388,1021.537 200.863,1012.012 200.863,1010.389 190.525,1000.051 190.525,996.544 182.982,989
G_INA0: R40.2 U9.125 | length 206.3
  Top Layer w0.25: R40.2@223.75,1019.25 v1(223.75,1021.766) ; v1(334.493,1019.861) 334.493,1020.572 335.051,1021.131 339.598,1021.131 340.665,1020.064 v1(340.665,1004.189) ; v1(371.78,997.382) 371.78,994.192 372.872,993.1 U9.125@376,993.1
  Bottom Layer w0.25: v1(223.75,1021.766) 226.568,1021.766 227.584,1022.782 227.584,1025.119 236.144,1033.678 278.46,1033.678 282.727,1037.946 300.126,1037.946 301.981,1036.091 314.35,1036.091 330.581,1019.861 v1(334.493,1019.861) ; v1(340.665,1004.189) 341.374,1004.898 376.582,1004.898 377.165,1004.316 377.165,1002.767 v1(371.78,997.382)
G_INA1: R39.2 U9.126 | length 208.7
  Top Layer w0.25: v1(215.75,1017.679) R39.2@215.75,1019.25 ; v1(340.36,1022.68) 341.196,1021.844 350.797,1021.844 353.644,1018.997 353.644,1001.928 354.101,1001.471 372.085,1001.471 378.79,994.766 378.79,993.648 377.592,992.45 U9.126@376,992.45
  Bottom Layer w0.25: v1(215.75,1017.679) 239.847,1041.776 244.452,1041.776 244.711,1042.035 319.989,1042.035 339.344,1022.68 v1(340.36,1022.68)
G_INA2: R38.2 U9.127 | length 161.1
  Top Layer w0.25: R38.2@238.25,1012 238.25,1009.423 v1(238.252,1009.421) ; v1(244.399,1008.431) 244.399,994.435 245.872,992.962 248.488,992.962 v1(249.86,991.591) ; v1(368.833,992.302) 369.335,991.8 U9.127@376,991.8
  Bottom Layer w0.25: v1(238.252,1009.421) 243.408,1009.421 v1(244.399,1008.431) ; v1(249.86,991.591) 250.145,991.305 274.148,991.305 274.636,991.794 282.296,992.022 284.709,992.022 286.537,993.851 290.969,993.851 293.808,991.012 302.37,991.012 302.92,991.563 313.602,991.563 314.102,991.063 322.688,991.063 323.367,991.743 361.315,991.743 363.449,989.609 366.141,989.609 v1(368.833,992.302)
G_INA3: R37.2 U9.128 | length 239.3
  Top Layer w0.25: v1(234.25,1010.449) R37.2@234.25,1012 ; v1(245.288,1013.435) 255.6,1023.747 255.6,1026.16 256.134,1026.693 260.02,1026.693 265.855,1020.858 265.855,982.098 267.183,980.77 v1(267.183,961.492) ; v1(352.468,963.93) 357.538,968.999 357.538,988.73 360.457,991.648 364.971,991.648 365.47,991.15 U9.128@376,991.15
  Bottom Layer w0.25: v1(234.25,1010.449) 237.236,1013.435 v1(245.288,1013.435) ; v1(267.183,961.492) 275.819,961.492 278.587,964.26 282.854,964.26 285.129,961.986 292.444,961.986 293.624,963.166 324.525,963.166 325.363,962.328 342.251,962.328 343.854,963.93 v1(352.468,963.93)
G_INA4: R36.2 U9.130 | length 203.6
  Top Layer w0.25: R36.2@226.25,1012 228.955,1014.705 240.386,1014.705 243.434,1011.657 251.689,1011.657 255.473,1015.441 255.473,1016.076 256.032,1016.635 263.906,1016.635 265.151,1015.39 v1(265.151,978.662) ; v1(362.737,977.443) 362.737,985.931 366.657,989.85 U9.130@376,989.85
  Bottom Layer w0.25: v1(265.151,978.662) 300.279,978.662 301.633,977.308 310.114,977.308 310.464,977.658 329.453,977.658 330.708,976.403 331.902,976.403 332.899,977.401 362.737,977.401 v1(362.737,977.443)
G_INA5: R35.2 U9.131 | length 207.5
  Top Layer w0.25: v1(218.618,1010.437) 218.75,1010.57 R35.2@218.75,1012 ; v1(260.833,981.431) 259.918,982.345 259.918,985.698 260.375,986.155 263.627,986.155 v1(263.627,1011.961) ; v1(372.291,988.695) 372.796,989.2 U9.131@376,989.2
  Bottom Layer w0.25: v1(218.618,1010.437) 219.608,1011.428 221.31,1011.428 223.317,1009.421 224.765,1009.421 232.105,1016.762 258.826,1016.762 v1(263.627,1011.961) ; v1(260.833,981.431) 262.636,983.234 277.571,983.234 281.176,986.839 284.556,986.839 284.884,986.511 311.734,986.511 312.52,987.296 325.622,987.296 326.882,986.036 338.031,986.036 341.376,989.381 362.664,989.381 363.35,988.695 v1(372.291,988.695)
G_INA6: R34.2 U9.133 | length 197.9
  Top Layer w0.25: R34.2@241.75,1004.5 241.75,991.318 244.119,988.949 244.119,982.234 243.404,981.518 243.404,978.517 243.568,978.353 243.568,964.964 244.424,964.108 247.625,964.108 248.793,965.276 248.793,976.177 253.615,980.999 v1(257.734,980.999) ; v1(364.617,977.826) 364.617,982.593 369.702,987.678 374.096,987.678 374.318,987.9 U9.133@376,987.9
  Bottom Layer w0.25: v1(257.734,980.999) 257.734,979.781 260.122,977.392 300.598,977.392 301.186,976.804 311.126,976.804 311.476,977.154 329.072,977.154 330.327,975.899 332.41,975.899 332.939,976.429 363.22,976.429 v1(364.617,977.826)
G_INA7: R33.2 U9.134 | length 176
  Top Layer w0.25: v1(230.75,999.506) R33.2@230.75,1004.5 ; U9.134@376,987.25 378.361,987.25 v1(378.689,987.577)
  Bottom Layer w0.25: v1(230.75,999.506) 229.819,998.576 229.819,994.156 230.403,993.572 239.979,993.572 246.456,1000.049 261.595,1000.049 264.211,997.433 277.646,997.433 279.17,998.957 290.424,998.957 291.135,998.245 294.427,998.245 298.055,994.617 314.642,994.617 315.121,995.096 368.571,995.096 373.812,989.855 373.812,986.13 374.396,985.545 376.657,985.545 v1(378.689,987.577)
G_INB0: R81.2 R89.2 U9.136 | length 227.2
  Top Layer w0.25: R89.2@278,950 v1(278,951.255) ; v1(316.027,954.278) 316.535,954.786 v1(316.535,985.393) ; R81.2@317.5,1040 327.177,1040 328.828,1038.349 328.828,1030.931 326.798,1028.901 326.798,1027.889 328.828,1025.859 328.828,1019.048 328.19,1018.41 326.387,1018.41 323.164,1015.187 323.164,1000.841 324.367,999.638 340.64,999.638 346.1,994.178 v1(346.1,988.365) ; U9.136@376,985.95 376.76,985.95 v1(377.673,985.037)
  Bottom Layer w0.25: v1(278,951.255) 279.959,951.255 281.965,953.262 315.011,953.262 v1(316.027,954.278) ; v1(316.535,985.393) 318.516,985.393 319.913,986.79 324.307,986.79 325.628,985.469 347.345,985.469 347.777,985.037 349.428,985.037 ; v1(346.1,988.365) 349.428,985.037 ; v1(377.673,985.037) 349.428,985.037
G_INB1: R80.2 R88.2 U9.137 | length 291.4
  Top Layer w0.25: 282.804,951.382 282.804,950 R88.2@283,950 ; v1(310.439,1039.495) 310.944,1040 R80.2@312.5,1040 ; v1(327.558,1031.418) 321.646,1025.506 321.646,1018.407 321.767,1018.286 321.767,993.597 322.402,992.962 325.628,992.962 326.847,991.743 326.847,983.232 325.071,981.456 325.071,980.362 326.847,978.586 326.847,973.049 325.069,971.271 325.069,969.772 326.136,968.705 330.044,968.705 331.123,967.627 331.123,966.072 330.759,965.708 330.048,965.708 329.54,965.2 329.54,951.23 v1(329.844,950.925) ; v1(366.261,953.922) 366.261,974.195 365.893,974.563 365.893,982.762 368.431,985.3 U9.137@376,985.3
  Bottom Layer w0.25: v1(310.439,1039.495) 319.481,1039.495 v1(327.558,1031.418) ; v1(329.844,950.925) 329.387,951.382 282.804,951.382 283.362,951.941 341.032,951.941 343.013,953.922 v1(366.261,953.922)
G_INB2: R79.2 R87.2 U9.139 | length 277.9
  Top Layer w0.25: v1(286.438,950) R87.2@288,950 ; R79.2@307.5,1040 308.356,1040 308.864,1039.492 308.864,1033.17 310.49,1031.545 310.49,1029.716 311.835,1028.371 314.874,1028.371 315.203,1028.7 315.203,1030.391 316.154,1031.342 318.821,1031.342 320.015,1030.148 320.015,976.909 321.742,975.182 321.742,964.159 320.218,962.635 320.218,954.786 319.024,953.592 v1(317.525,953.592) ; v1(368.448,952.396) 369.314,953.262 369.314,954.559 366.905,956.968 366.905,975.067 366.397,975.575 366.397,977.095 367.34,978.038 367.34,983.143 368.198,984 U9.139@376,984
  Bottom Layer w0.25: v1(317.525,953.592) 316.535,952.602 282.423,952.602 280.416,950.595 280.416,949.503 280.924,948.995 285.433,948.995 v1(286.438,950) 287.312,950.874 327.86,950.874 328.823,949.911 330.858,949.911 331.822,950.874 340.845,950.874 342.367,952.396 v1(368.448,952.396)
G_INB3: R78.2 R86.2 U9.140 | length 197.4
  Top Layer w0.25: R86.2@293,950 294.64,950 296.52,951.88 v1(296.52,975.792) ; R78.2@302.5,1040 303.304,1040 303.682,1039.622 303.682,1026.668 301.752,1024.738 301.752,1022.299 303.047,1021.004 303.047,1015.501 304.673,1013.875 305.816,1013.875 306.978,1012.713 306.978,1009.707 309.093,1007.593 309.093,1007.135 309.325,1006.903 309.325,999.465 309.522,999.267 309.522,997.483 309.497,997.458 309.497,992.429 308.61,991.542 308.61,985.19 307.672,984.252 307.672,982.65 307.924,982.398 307.924,976.3 v1(306.908,975.284) ; v1(367.411,976.081) 367.919,976.081 367.954,976.116 367.954,981.483 369.897,983.426 375.742,983.426 375.818,983.35 U9.140@376,983.35
  Bottom Layer w0.25: v1(306.908,975.284) v1@306.509,975.683 ; v1(367.411,976.081) 365.267,976.081 364.607,975.421 333.523,975.421 332.994,974.891 328.215,974.891 326.96,976.146 319.191,976.146 318.728,975.683 v1@306.509,975.683 ; v1@306.509,975.683 296.629,975.683 v1(296.52,975.792) 306.4,975.792 v1@306.509,975.683
G_INB4: R77.2 R85.2 U9.142 | length 228.1
  Top Layer w0.25: v1(275.93,960) R85.2@278,960 ; R77.2@317.5,1030.5 318.643,1030.5 319.253,1029.89 319.253,976.141 321.23,974.163 321.23,966.517 318.539,963.826 v1(318.539,955.292) ; U9.142@376,982.05 v1(379.188,982.05)
  Bottom Layer w0.25: v1(275.93,960) 281.373,954.557 314.278,954.557 315.013,955.292 v1(318.539,955.292) 361.186,955.292 365.633,959.739 383.565,959.739 386.156,962.33 387.604,962.33 389.255,963.981 389.255,965.86 388.62,966.495 388.62,973.658 384.226,978.052 379.757,978.052 379.188,978.621 v1(379.188,982.05)
G_INB5: R76.2 R84.2 U9.143 | length 228.9
  Top Layer w0.25: R84.2@283,963 283.81,963 284.15,962.66 284.15,957.25 v1(283.616,956.716) ; R76.2@312.5,1030.5 313.334,1030.5 316.183,1033.348 319.938,1033.348 320.638,1032.649 320.638,983.728 322.25,982.116 v1(322.25,959.104) ; v1(358.597,959.079) v1(358.597,982.396) ; v1(374.3,981.4) U9.143@376,981.4
  Bottom Layer w0.25: v1(283.616,956.716) 285.217,955.116 303.225,955.116 304.521,956.412 ; v1(322.25,959.104) 307.213,959.104 304.521,956.412 ; v1(358.597,959.079) 355.93,956.412 304.521,956.412 ; v1(358.597,982.396) 359.063,982.862 372.838,982.862 v1(374.3,981.4)
G_INB6: R75.2 R83.2 U9.144 | length 220.2
  Top Layer w0.25: v1(286.436,963.346) 286.782,963 R83.2@288,963 ; R75.2@307.5,1030.5 307.5,1029.767 v1(309.474,1029.767) ; v1(315.468,968.832) 315.762,969.126 315.762,976.093 315.373,976.481 315.373,1002.24 317.602,1004.468 317.602,1024.547 316.967,1025.182 v1(316.967,1025.627) ; v1(374.142,965.175) 374.505,965.175 381.135,971.804 381.737,971.804 382.245,972.312 382.245,980.013 381.508,980.75 U9.144@376,980.75
  Bottom Layer w0.25: v1(309.474,1029.767) 311.737,1029.767 313.538,1027.966 316.278,1027.966 316.967,1027.278 v1(316.967,1025.627) ; v1(315.468,968.832) 295.986,968.832 293.395,966.241 287.147,966.241 286.436,965.53 v1(286.436,963.346) 286.78,963.002 292.264,963.002 292.932,963.67 324.747,963.67 325.579,962.838 341.732,962.838 343.56,964.667 351.688,964.667 352.196,965.175 v1(374.142,965.175)
G_INB7: R74.2 R82.2 U9.145 | length 236.3
  Top Layer w0.25: v1(291.44,964.032) 292.075,963.397 R82.2@293,963 293.294,963 293.294,961.974 294.132,961.136 294.132,954.43 291.871,952.17 291.871,948.944 292.176,948.639 296.037,948.639 297.536,950.138 297.536,986.993 297.332,987.196 297.332,996.761 294.488,999.606 294.488,1011.936 299.364,1016.813 299.364,1029.208 300.656,1030.5 R74.2@302.5,1030.5 ; v1(372.288,981.837) 374.025,980.1 U9.145@376,980.1
  Bottom Layer w0.25: v1(291.44,964.032) 291.973,964.565 323.395,964.565 327.203,968.373 330.25,968.373 331.446,969.569 339.092,969.569 341.376,967.285 342.47,967.285 344.75,969.565 353.727,969.565 354.866,968.426 378.79,968.426 379.195,968.83 380.596,968.83 381.178,968.248 381.178,967.564 381.508,967.234 382.778,967.234 383.257,967.863 385.42,970.026 385.42,973.226 383.616,975.03 377.444,975.03 376.936,975.538 376.936,976.048 375.107,977.877 375.107,979.018 v1(372.288,981.837)
GA0: C126.2 R152.1 U14.8 | length 29
  Top Layer w0.25: v1(450.444,968.299) 450.45,968.305 R152.1@450.45,969.85
  Bottom Layer w0.25: v1(450.444,968.299) 450.756,967.987 473.513,967.987 C126.2@476.5,965
GA1: C124.2 R151.1 U14.10 | length 28.2
  Top Layer w0.25: v1(450.444,973.284) 450.45,973.29 R151.1@450.45,974.85
  Bottom Layer w0.25: v1(450.444,973.284) 450.717,973.557 475.443,973.557 C124.2@476.5,972.5
GA2: C122.2 R150.1 U14.4 | length 28.3
  Top Layer w0.25: v1(450.444,978.281) 450.45,978.287 R150.1@450.45,979.85
  Bottom Layer w0.25: v1(450.444,978.281) 450.742,978.58 475.08,978.58 C122.2@476.5,980